# EAGLE board Always Accurate Clock rev1 (EAGLE 9.6.2)

Size 160 x 100 mm. Coordinates in mm from the lower left corner, seen from the top.
Outline: 0,0 160,0 160,100 0,100 0,0
Copper layers (1*16): Top 0.035mm / dielectric 1.5mm / Bottom 0.035mm
Design rules "default": minimum track width 6mil, minimum drill 0.35mm, track to track 6mil, track to pad 6mil, pad to pad 6mil, via to via 6mil, smd to smd 6mil, copper to edge 40mil, drill to drill 6mil, minimum pad ring 10mil, minimum via ring 8mil, stop-mask expansion 4mil, vias tented up to drill 0mil, thermal gap 10mil

## Footprints (pad centres in the part's own frame; a part is rotated, then mirrored left to right if it is on the bottom)
TEENSY_SHORT = drill 1.016: 3.3V 0,5.08; AGND/GND 0,2.54; D0 15.24,2.54; D1 15.24,5.08; D2 15.24,7.62; D3 15.24,10.16; D4 15.24,12.7; D5 15.24,15.24; D6 15.24,17.78; D7 15.24,20.32; D8 15.24,22.86; D9 15.24,25.4; D10 15.24,27.94; D11 15.24,30.48; D12 15.24,33.02; D13 0,33.02; D14 0,30.48; D15 0,27.94; D16 0,25.4; D17 0,22.86; D18 0,20.32; D19 0,17.78; D20 0,15.24; D21 0,12.7; D22 0,10.16; D23 0,7.62; GND 15.24,0; VIN 0,0
0603-CAP = smd 0.9 x 0.9: 1 -0.75,0; 2 0.75,0
DSM7T = smd 1.5 x 2: 1 -5.08,-9.5; 2 -2.54,-9.5; 3 0,-9.5; 4 2.54,-9.5; 5 5.08,-9.5; 6 5.08,9.5; 7 2.54,9.5; 8 0,9.5; 9 -2.54,9.5; 10 -5.08,9.5
U.FL = smd 1.05 x 2.2: 1 1.475,0; 3 -1.475,0 | smd 1 x 1: 2 0,-1.5
LQH5BPN = smd 1.85 x 4.1: 1 1.825,0; 2 -1.825,0
0603-RES = smd 0.9 x 0.8: 1 -0.85,0; 2 0.85,0
YIC51612EBGG = smd 0.9 x 0.7: 1 11.75,-15; 2 11.75,-13.9; 3 11.75,-12.8; 4 11.75,-11.7; 5 11.75,-10.6; 6 11.75,-9.5; 7 11.75,-8.4; 8 11.75,-5.4; 9 11.75,-4.3; 10 11.75,-3.2; 11 11.75,-2.1; 12 11.75,-1; 13 0.45,-1; 14 0.45,-2.1; 15 0.45,-3.2; 16 0.45,-4.3; 17 0.45,-5.4; 18 0.45,-8.4; 19 0.45,-9.5; 20 0.45,-10.6; 21 0.45,-11.7; 22 0.45,-12.8; 23 0.45,-13.9; 24 0.45,-15
SOT-23-5 = smd 0.62 x 1.22: 1 -0.95,-1.31; 2 0,-1.31; 3 0.95,-1.31; 4 0.95,1.31; 5 -0.95,1.31

## Placement (x,y rotation side)
A1  TEENSY_4.0  [TEENSY_SHORT]  -30.48,2.54 0 top  (outside the outline)
C1  CAPACITOR_0603_6.3V_10UF  [0603-CAP]  -33.02,39.37 0 top  (outside the outline)
C2  CAPACITOR_0603_10V_10UF  [0603-CAP]  -36.83,39.37 0 top  (outside the outline)
C3  CAPACITOR_0603_10V_0.1NF  [0603-CAP]  -44.45,-6.35 0 top  (outside the outline)
C4  CAPACITOR_0603_10V_0.1NF  [0603-CAP]  -44.45,-10.16 0 top  (outside the outline)
C5  CAPACITOR_0603_10V_0.1UF  [0603-CAP]  -44.45,-13.97 0 top  (outside the outline)
D1  LED_7_SEGMENT_BLUE_DSM7TA  [DSM7T]  -54.61,-3.81 0 top  (outside the outline)
D2  LED_7_SEGMENT_BLUE_DSM7TA  [DSM7T]  -69.85,-3.81 0 top  (outside the outline)
D3  LED_7_SEGMENT_BLUE_DSM7TA  [DSM7T]  -85.09,-3.81 0 top  (outside the outline)
D4  LED_7_SEGMENT_BLUE_DSM7TA  [DSM7T]  -100.33,-3.81 0 top  (outside the outline)
J1  U.FL-R-SMT(10)  [U.FL]  -22.86,40.64 0 top  (outside the outline)
L1  INDUCTOR__LQH5BPN4R7NT0L_4.7UH  [LQH5BPN]  -16.51,40.64 0 top  (outside the outline)
R1  RESISTOR_0603_22  [0603-RES]  -40.64,39.37 0 top  (outside the outline)
R2  RESISTOR_0603_22  [0603-RES]  -44.45,39.37 0 top  (outside the outline)
R3  RESISTOR_0603_10K  [0603-RES]  -15.24,46.99 0 top  (outside the outline)
R4  RESISTOR_0603_240  [0603-RES]  -44.45,-2.54 0 top  (outside the outline)
U1  YIC51612EBGG-33  [YIC51612EBGG]  -45.72,17.78 0 top  (outside the outline)
U2  IC_REG_BOOST_XC9142B50CMR-G  [SOT-23-5]  -27.94,40.64 0 top  (outside the outline)

## Library data of the parts
A1 = HyTechDevices; TEENSY: 4.0
C1 = footprints; CAPACITANCE: 10µF; DKPN: 490-3896-2-ND; MANUFACTURER: Murata Electronics; MOPN: 81-GRM188R60J106ME47; MPN: GRM188R60J106ME47D; TOLERANCE: 20%; VOLTAGE: 6.3V
C2 = footprints; CAPACITANCE: 10µF; DKPN: 490-7200-2-ND; MANUFACTURER: Murata Electronics; MOPN: 81-GRM188D71A106MA3D; MPN: GRM188D71A106MA73D; TOLERANCE: 20%; VOLTAGE: 10V
C3 C4 = footprints; CAPACITANCE: 0.1nF; DKPN: 478-11846-2-ND; MANUFACTURER: KYOCERA AVX; MOPN: 581-0603ZC101KAT2A; MPN: 0603ZC101KAT2A; TOLERANCE: 10%; VOLTAGE: 10V
C5 = footprints; CAPACITANCE: 0.1µF; DKPN: 720-1688-1-ND; MANUFACTURER: Vishay Vitramon; MOPN: 77-VJ0603Y104JXQPBC; MPN: VJ0603Y104JXQPW1BC; TOLERANCE: 5%; VOLTAGE: 10V
D1-D4 = HyTechDevices; COLOR: Blue; DKPN: DSM7TA56106TTR-ND; MANUFACTURER: Visual Communications Company; MOPN: 593-DSM7TA56106T; MPN: DSM7TA56106T
J1 = footprints; DKPN: H9161TR-ND; MANUFACTURER: Hirose Electric Co Ltd; MOPN: 798-U.FL-R-SMT10; MPN: U.FL-R-SMT(10)
L1 = footprints; CURRENT_RATED: 2A; CURRENT_SATURATION: 3A; DCR: 0.058; DKPN: 490-7779-2-ND; INDUCTANCE: 4.7µH; MANUFACTURER: Murata Electronics; MOPN: 81-LQH5BPN4R7NT0L0L; MPN: LQH5BPN4R7NT0L; TOLERANCE: 30%
R1 R2 = HyTechDevices; DKPN: 311-22.0HRCT-ND; MANUFACTURER: Yageo; MOPN: 603-RC0603FR-0722RL; MPN: RC0603FR-0722RL; POWER: 0.1W; RESISTANCE: 22; TOLERANCE: 1%; VOLTAGE_CONTINUOUS: 1.48V; VOLTAGE_MAX: 75V
R3 = HyTechDevices; DKPN: 311-10.0KHRCT-ND; MANUFACTURER: Yageo; MOPN: 603-RC0603FR-0710KL; MPN: RC0603FR-0710KL; POWER: 0.1W; RESISTANCE: 10k; TOLERANCE: 1%; VOLTAGE_CONTINUOUS: 31.62V; VOLTAGE_MAX: 75V
R4 = HyTechDevices; DKPN: 311-240HRCT-ND; MANUFACTURER: Yageo; MOPN: 603-RC0603FR-07240RL; MPN: RC0603FR-07240RL; POWER: 0.1W; RESISTANCE: 240; TOLERANCE: 1%; VOLTAGE_CONTINUOUS: 4.90V; VOLTAGE_MAX: 75V
U1 = footprints; DKPN: 3155-YIC51612EBGGTR-ND; MANUFACTURER: YIC; MPN: YIC51612EBGG
U2 = footprints; DKPN: 893-1373-2-ND; MANUFACTURER: Torex Semiconductor Ltd; MOPN: 865-XC9142B50CMR-G; MPN: XC9142B50CMR-G

## Nets
+3V3: A1.3.3V C5.1 U1.22 U1.23
+5V: A1.VIN C2.1 U2.4
GND: A1.AGND/GND A1.GND C1.2 C2.2 C3.2 C4.2 C5.2 J1.1 J1.3 U1.10 U1.24 U2.2
N$1: R3.1 U2.1
N$2: L1.1 U2.5
N$3: A1.D1 R1.1
N$4: A1.D0 R2.1
N$5: C4.1 R2.2 U1.20
N$6: C3.1 R1.2 U1.21
N$7: J1.2 U1.11
TIMEPULSE: A1.D3 R4.1 R4.2 U1.3
VBAT: C1.1 L1.2 R3.2 U2.3
VDD: D1.3 D1.8 D2.3 D2.8 D3.3 D3.8 D4.3 D4.8

## Tracks (layer width: path | path; a pad name or v marks a point on that pad's centre or on a via)
+3V3  (3 unrouted)
+5V  (2 unrouted)
GND  (11 unrouted)
N$1  (1 unrouted)
N$2  (1 unrouted)
N$3  (1 unrouted)
N$4  (1 unrouted)
N$5  (2 unrouted)
N$6  (2 unrouted)
N$7  (1 unrouted)
TIMEPULSE  (3 unrouted)
VBAT  (3 unrouted)
VDD  (7 unrouted)